# Altium PCB power.PcbDoc
Units mm, origin at the board's own origin, x right, y up, seen from the top; angles counter-clockwise.
Board outline 42.42 x 81.41 mm, 4 copper layers (Top Layer, Layer 1, Layer 2, Bottom Layer), stack 0.603 mm thick; 57 components, 23 nets, 124 pads, 0 vias.
Unrouted connection lines stored in the file: 27.
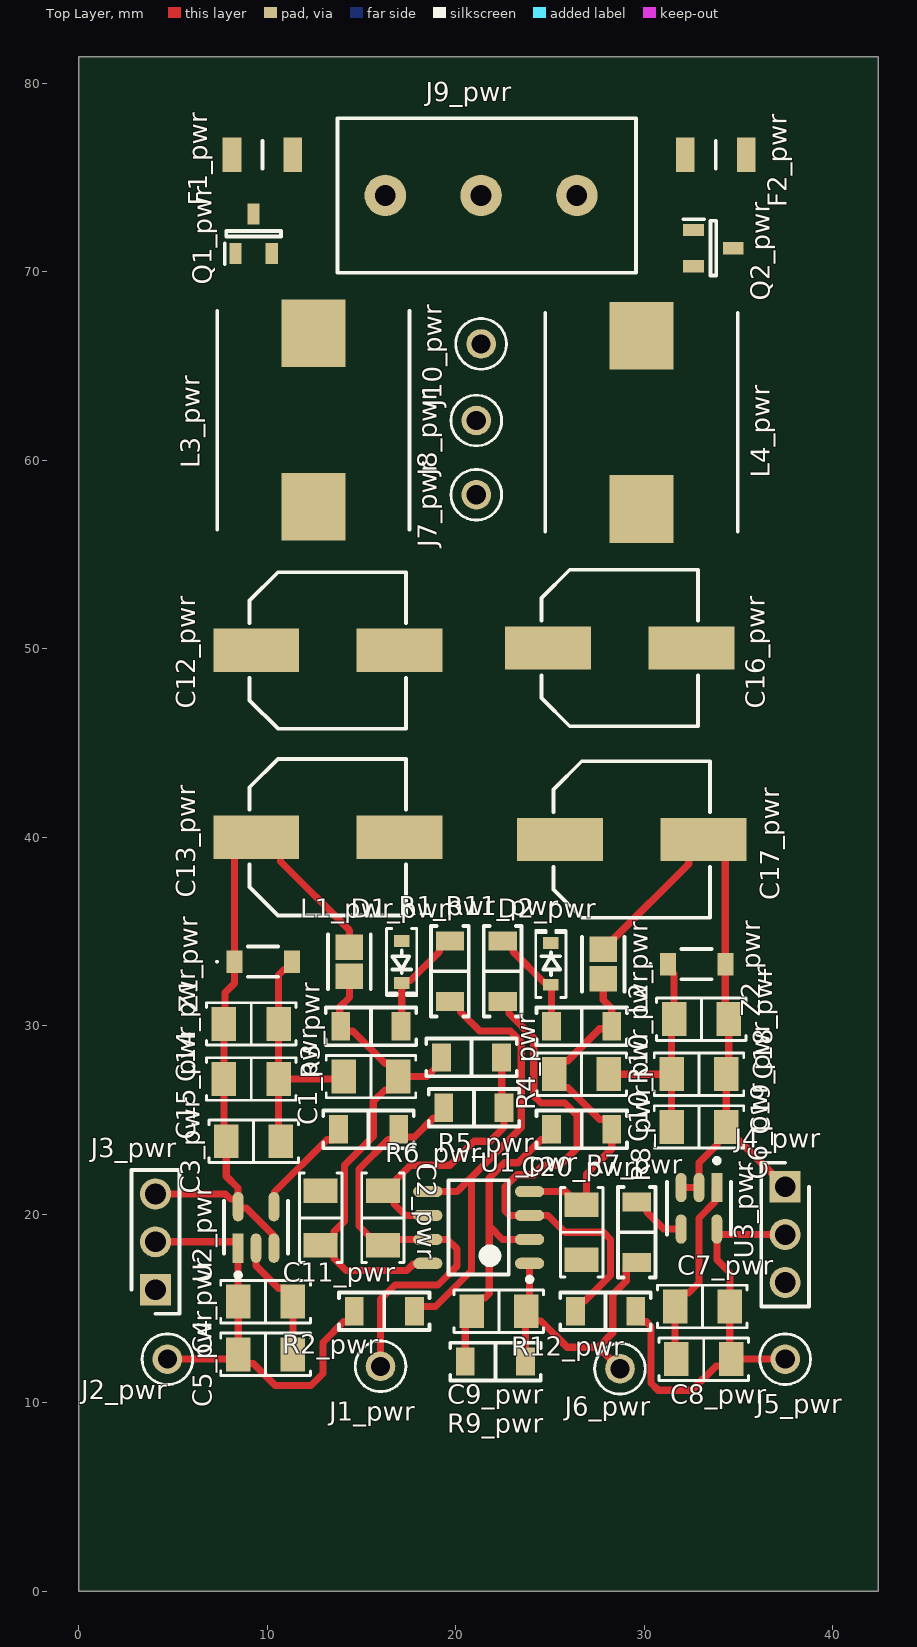
[diagram p0: Top Layer view]
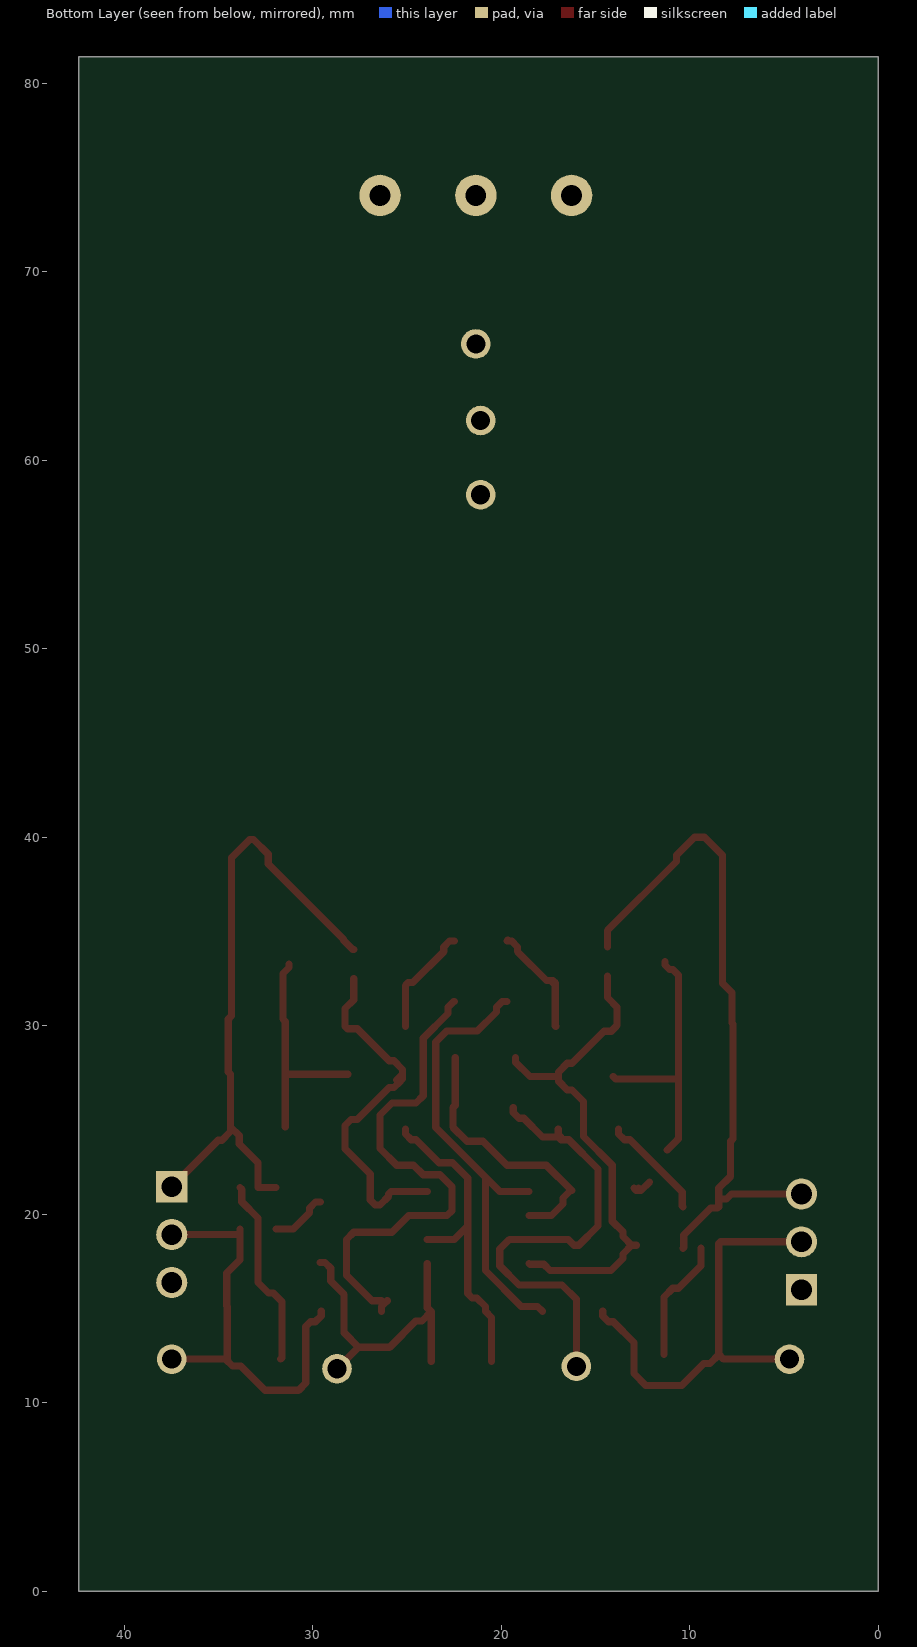
[diagram p1: Bottom Layer view, seen from below]

## Layer stack, top to bottom
Top Solder: solder mask 0.0102, Solder Resist, Dk 3.5
Top Layer: signal copper 0.0356
Dielectric 2: prepreg 0.0711, PP-006, Dk 4.1
Layer 1: signal copper 0.035
Dielectric 1: dielectric 0.32, FR-4, Dk 4.8
Layer 2: signal copper 0.035
Dielectric 3: prepreg 0.0711, PP-006, Dk 4.1
Bottom Layer: signal copper 0.0356
Bottom Solder: solder mask 0.0102, Solder Resist, Dk 3.5

## Board outline
0,0 0,81.407 42.418,81.407 42.418,0

## Design rules (kind name [scope] priority, off if disabled: settings)
BoardOutlineClearance [All] p1: gap=0.3 ignorepadtopadclearanceinfootprint=FALSE except(0.4: Arc-SplitBarrior Arc-SplitContinuation Track-SplitBarrior Track-SplitContinuation SMDPad-SplitBarrior SMDPad-SplitContinuation THPad-SplitBarrior THPad-SplitContinuation Via-SplitBarrior Via-SplitContinuation Fill-SplitBarrior Fill-SplitContinuation Poly-SplitBarrior Poly-SplitContinuation Region-SplitBarrior Region-SplitContinuation Text-SplitBarrior Text-SplitContinuation)
Clearance "Clearance Different Nets" [All] p1: gap=0.2 ignorepadtopadclearanceinfootprint=FALSE except(0.089: Arc-Arc Arc-Track Arc-SMDPad Track-Track Track-SMDPad; 0.127: SMDPad-SMDPad SMDPad-Via THPad-Via Via-Via; 0.254: Arc-Via Arc-Text Track-Via Track-Text SMDPad-Text THPad-Text Via-Text Fill-Text Poly-Text Region-Text Text-Text; 0.5: THPad-THPad Via-Hole)
Clearance "Clearance Same Nets" [All] p2: gap=0.2 ignorepadtopadclearanceinfootprint=FALSE except(0.089: Arc-Arc Arc-Track Arc-SMDPad Track-Track Track-SMDPad SMDPad-SMDPad; 0.127: SMDPad-Via THPad-Via; 0.254: Arc-Via Arc-Text Track-Via Track-Text SMDPad-Text THPad-Text Via-Via Via-Text Fill-Text Poly-Text Region-Text Text-Text)
Clearance "Clearance Bottom Layer" [OnLayer('Bottom Layer')] p3: gap=0.203 ignorepadtopadclearanceinfootprint=TRUE except(0.254: Arc-Text Track-Text SMDPad-Text THPad-Text Via-Text Fill-Text Poly-Text Region-Text Text-Text)
Clearance "Clearance Top Layer" [OnLayer('Top Layer')] p4: gap=0.203 ignorepadtopadclearanceinfootprint=TRUE except(0.254: Arc-Text Track-Text SMDPad-Text THPad-Text Via-Text Fill-Text Poly-Text Region-Text Text-Text)
Clearance [All] p5: gap=0.254 ignorepadtopadclearanceinfootprint=FALSE except(0: Arc-Hole Track-Hole SMDPad-Hole THPad-Hole Via-Hole Fill-Hole Poly-Hole Region-Hole Text-Hole)
HoleSize [All] p1: absolutevalues=TRUE maxlimit=6.3 minlimit=0.2 maxpercent=80.000 minpercent=20.000
MinimumAnnularRing [All] p1: minimumring=0.13
MinimumSolderMaskSliver [All] p1: minsoldermaskwidth=0.1
ParallelSegment [All] p1: limit=254 gap=0.254
PolygonConnect PolygonConnect_1 [All] p1: thpad.connectstyle=Relief thpad.reliefconductorwidth=0.508 thpad.reliefentries=4 thpad.polygonreliefangle="90 Angle" thpad.airgapwidth=0.254 smdpad.connectstyle=Relief smdpad.reliefconductorwidth=0.508 smdpad.reliefentries=4 smdpad.polygonreliefangle="90 Angle" smdpad.airgapwidth=0.254 via.connectstyle=Direct via.reliefconductorwidth=0.508 via.reliefentries=4 via.polygonreliefangle="90 Angle" via.airgapwidth=0.254
PolygonConnect [All] p2: connectstyle=Relief reliefconductorwidth=0.254 reliefentries=4 polygonreliefangle="90 Angle" airgapwidth=0.254
RoutingCorners [All] p1: cornerstyle=Round minsetback=2.54 maxsetback=2.54
RoutingVias [All] p1: holewidth=0.5 width=1 viastyle="Through Hole" minholewidth=0.2 minwidth=0.35 maxholewidth=1 maxwidth=2
SilkToSilkClearance [All] p1: silktosilkclearance=0.1
SilkToSolderMaskClearance [IsPad] p1: minsilkscreentomaskgap=0.1 clearancetoexposedcopper=TRUE
SolderMaskExpansion [All] p1: expansion=0.102 istentingtop=FALSE
Width [All] p1: maxlimit=2.54 minlimit=0.089 preferedwidth=0.381
25 further rules are at their usual default settings.

## Classes and differential pairs
component class misc_pwr: C11_pwr C12_pwr C13_pwr C14_pwr C15_pwr C16_pwr C17_pwr C18_pwr C19_pwr C20_pwr F1_pwr F2_pwr J7_pwr J8_pwr J9_pwr J10_pwr L3_pwr L4_pwr Q1_pwr Q2_pwr Z1_pwr Z2_pwr
component class LDO: C1_pwr C2_pwr C3_pwr C4_pwr C5_pwr C6_pwr C7_pwr C8_pwr C9_pwr C10_pwr D1_pwr D2_pwr D? J1_pwr J2_pwr J3_pwr J4_pwr J5_pwr J6_pwr L1_pwr L2_pwr R1_pwr R2_pwr R3_pwr R4_pwr R5_pwr R6_pwr R7_pwr R8_pwr R9_pwr R10_pwr R11_pwr R12_pwr U1_pwr U2_pwr U3_pwr

## Components (designator, comment, footprint, x,y, rotation, side; value= is the part's Value field where it differs from the comment)
C1_pwr "10 µF" "CAP 1206_3216 - 0.8MM" 15.506,27.305 r0 top
C2_pwr "47pF" "CAP 1206_3216 - 1.8MM" 16.141,19.812 r270 top
C3_pwr "2.2 µF" "CAP 1206_3216 - 0.8MM" 9.283,23.876 r180 top
C4_pwr "2.2 µF" "CAP 1206_3216 - 0.8MM" 9.918,15.367 r180 top
C5_pwr "2.2 µF" "CAP 1206_3216 - 0.8MM" 9.918,12.573 r180 top
C6_pwr "2.2 µF" "CAP 1206_3216 - 0.8MM" 32.905,24.638 r0 top
C7_pwr "2.2 µF" "CAP 1206_3216 - 0.8MM" 33.085,15.113 r0 top
C8_pwr "2.2 µF" "CAP 1206_3216 - 0.8MM" 33.159,12.319 r0 top
C9_pwr "47pF" "CAP 1206_3216 - 1.8MM" 22.29,14.859 r0 top
C10_pwr "10 µF" "CAP 1206_3216 - 0.8MM" 26.682,27.432 r180 top
C11_pwr "0.1 µF" "CAP 1206_3216 - 0.8MM" 12.839,19.812 r90 top
C12_pwr "100 µF" "CAP ALSMD 8.3MM H10.5MM" 13.22,49.911 r0 top
C13_pwr "100 µF" "CAP ALSMD 8.3MM H10.5MM" 13.22,40.005 r0 top
C14_pwr "10 µF" "CAP 1206_3216 - 0.8MM" 9.156,30.099 r180 top
C15_pwr "0.1 µF" "CAP 1206_3216 - 0.8MM" 9.156,27.178 r180 top
C16_pwr "100 µF" "CAP ALSMD 8.3MM H10.5MM" 28.704,50.038 r0 top
C17_pwr "100 µF" "CAP ALSMD 8.3MM H10.5MM" 29.339,39.878 r0 top
C18_pwr "10 µF" "CAP 1206_3216 - 0.8MM" 33.032,30.353 r180 top
C19_pwr "0.1 µF" "CAP 1206_3216 - 0.8MM" 32.905,27.432 r180 top
C20_pwr "0.1 µF" "CAP 1206_3216 - 0.8MM" 26.682,19.05 r90 top
D1_pwr "1V8" SOD323 17.157,33.401 r270 top
D2_pwr "1V8" SOD323 25.031,33.274 r90 top
F1_pwr "PTS12066V150" FUSC3216X90N 9.75,76.2 r0 top
F2_pwr "PTS12066V150" FUSC3216X90N 33.794,76.2 r180 top
J1_pwr "5001" FP-5001-MFG 16.014,11.938 r0 top
J2_pwr "5001" FP-5001-MFG 4.711,12.319 r0 top
J3_pwr "M20-9990346" "HDRV3W64P0X254_1X3_762X254X864P - duplicate" 4.076,16.002 r90 top
J4_pwr "M20-9990346" "HDRV3W64P0X254_1X3_762X254X864P - duplicate" 37.477,21.463 r270 top
J5_pwr "5001" FP-5001-MFG 37.477,12.319 r0 top
J6_pwr "5001" FP-5001-MFG 28.714,11.811 r0 top
J7_pwr "5001" FP-5001-MFG 21.094,58.166 r0 top
J8_pwr "5001" FP-5001-MFG 21.094,62.103 r0 top
J9_pwr "282837-3" "TE 282837-3" 21.348,74.041 r0 top
J10_pwr "5001" FP-5001-MFG 21.348,66.167 r0 top
L1_pwr "3.3uH" FP-MLZ2012-1_25-IPC_B 14.363,33.401 r270 top
L2_pwr "3.3uH" FP-MLZ2012-1_25-IPC_B 27.825,33.274 r270 top
L3_pwr "33uH" INDPM116102X400N 12.458,62.131 r270 top
L4_pwr "33uH" INDPM116102X400N 29.857,62.004 r90 top
Q1_pwr "DMP3125L-7" SOT96P240X110-3N 9.283,72.009 r90 top
Q2_pwr "DMG3406L-13" SOT96P240X110-3N 33.667,71.247 r0 top
R1_pwr "10 kOhms" "YAGEO RES 1206_3216" 19.697,32.893 r90 top
R2_pwr "10 kOhms" "YAGEO RES 1206_3216" 16.217,14.859 r0 top
R3_pwr "1 kOhms" "YAGEO RES 1206_3216" 15.506,29.972 r0 top
R4_pwr "10 kOhms" "YAGEO RES 1206_3216" 20.84,28.321 r180 top
R5_pwr "10 kOhms" "YAGEO RES 1206_3216" 20.967,25.654 r0 top
R6_pwr "3.3 kOhms" "YAGEO RES 1206_3216" 15.379,24.511 r180 top
R7_pwr "3.3 kOhms" "YAGEO RES 1206_3216" 29.603,19.05 r270 top
R8_pwr "10 kOhms" "YAGEO RES 1206_3216" 26.682,24.511 r0 top
R9_pwr "10 kOhms" "YAGEO RES 1206_3216" 22.11,12.192 r180 top
R10_pwr "1 kOhms" "YAGEO RES 1206_3216" 26.682,29.972 r0 top
R11_pwr "10 kOhms" "YAGEO RES 1206_3216" 22.491,32.893 r90 top
R12_pwr "10 kOhms" "YAGEO RES 1206_3216" 27.952,14.859 r180 top
U1_pwr "TLV9362" SOIC8-127P600X175-8N 21.221,19.304 r180 top
U2_pwr "ST730MR" FP-UJ-5-IPC_B 9.41,19.304 r90 top
U3_pwr "ADP7182AUJZ-R7" FP-UJ-5-IPC_B 32.905,20.32 r270 top
Z1_pwr "SMF15VTFTR" SMF15VTFTR 9.791,33.401 r90 top
Z2_pwr "SMF15VTFTR" SMF15VTFTR 32.778,33.274 r90 top

## Footprints (in the part's own frame and the unit in brackets; to place one, negate y for a bottom-side part, rotate by r counter-clockwise, add the part's x,y. Pads: shape width x height; smd on the part's side, far side on the other; paste and mask are expansions set on the pad)
"CAP 1206_3216 - 0.8MM" [mm] "Chip Capacitor, 2-Leads, Body 3.25x1.60mm, IPC Medium Density"
  rect 1.3x1.8 smd: 1(-1.45,0) 2(1.45,0)
  silkscreen extent -2.37,-1.12 2.37,1.12, body extent -1.6,-0.8 1.6,0.8, height 0.8
"CAP 1206_3216 - 1.8MM" [mm] "Chip Capacitor, 2-Leads, Body 3.25x1.60mm, IPC Medium Density"
  rect 1.3x1.8 smd: 1(-1.45,0) 2(1.45,0)
  silkscreen extent -2.37,-1.12 2.37,1.12, body extent -1.6,-0.8 1.6,0.8, height 1.8
"CAP ALSMD 8.3MM H10.5MM" [mm] "Aluminum Electrolytic Capacitor, Body 8.30x8.30x10.50mm, IPC Low Density"
  rect 4.55x2.3 smd: 1(-3.8,0) 2(3.8,0)
  silkscreen extent -4.15,-4.15 4.15,4.15, body extent -4.95,-4.15 4.95,4.15, height 10.5
FP-5001-MFG [mm]
  round 1.57 hole 1.016 paste-2539.97 mask+0: 1(0,0)
  silkscreen extent -1.35,-1.34 1.35,1.34, body extent -1.45,-1.45 1.45,1.45, height 0.25
FP-MLZ2012-1_25-IPC_B [mm]
  rect 1.354x1.456 smd paste+0 mask+0: 1(-0.776,0) 2(0.776,0)
  silkscreen extent -1.45,-1.13 1.45,1.13, body extent -1.7,-0.98 1.7,0.98, height 0.25
FP-UJ-5-IPC_B [mm]
  rect 1.554x0.572 smd paste+0 mask+0: 1(-1.1,0.95)
  rrect100% 1.554x0.572 smd paste+0 mask+0: 2(-1.1,0) 3(-1.1,-0.95) 4(1.1,-0.95) 5(1.1,0.95)
  silkscreen extent -2.65,-1.7 1.4,1.7, body extent -2.13,-1.7 2.13,1.7, height 0.25
FUSC3216X90N [mm]
  rect 0.99x1.82 smd: 1(-1.61,0) 2(1.61,0)
  silkscreen extent 0,-0.72 0,0.72, body extent -1.6,-0.8 1.6,0.8, height 0.71
"HDRV3W64P0X254_1X3_762X254X864P - duplicate" [mm]
  rect 1.65x1.65 hole 1.1: 1(0,0)
  round 1.65 hole 1.1: 2(2.54,0) 3(5.08,0)
  silkscreen extent -1.27,-1.27 6.35,1.27, body extent -1.27,-1.27 6.35,1.27, height 8.64
INDPM116102X400N [mm]
  rect 3.6x3.4 smd: 1(-4.6,0) 2(4.6,0)
  silkscreen extent -5.8,-5.1 5.8,5.1, body extent -5.8,-5.1 5.8,5.1, height 4
SMF15VTFTR [mm]
  rect 1.2x0.85 smd: 1(0,1.525) 2(0,-1.525)
  silkscreen extent -0.8,-0.8 0.8,2.5, body extent -0.8,-1.87 0.8,1.87, height 1
SOD323 [mm]
  rect 0.625x0.83 smd: 1(-1.101,-0.02) 2(1.124,-0.02)
  silkscreen extent -1.77,-0.82 1.79,0.78, body extent -1.35,-0.64 1.37,0.6, height 1.05
SOIC8-127P600X175-8N [mm] "SOIC, 8-Leads, Body 4.91x3.90mm, Pitch 1.27mm, IPC Medium Density"
  oval 1.55x0.6 smd: 1(-2.7,1.905) 2(-2.7,0.635) 3(-2.7,-0.635) 4(-2.7,-1.905) 5(2.7,-1.905) 6(2.7,-0.635) 7(2.7,0.635) 8(2.7,1.905)
  silkscreen extent -2.83,-2.5 1.6,2.88, body extent -3,-2.5 3,2.5, height 1.75
SOT96P240X110-3N [mm]
  rect 1.1x0.65 smd: 1(-1.05,0.96) 2(-1.05,-0.96) 3(1.05,0)
  silkscreen extent -1.6,-1.45 0.15,1.54, body extent -1.2,-1.45 1.2,1.45, height 1.1
"TE 282837-3" [mm] "Wire to Board Terminal Block Horizontal with Board, 3 Postions, Body 15.84x8.2mm, Pitch 5.08mm"
  round 2.2 hole 1.1: 1(-5.08,0) 2(0,0) 3(5.08,0)
  silkscreen extent -7.62,-4.1 8.22,4.1, body extent -7.62,-4.1 8.22,4.1, height 10.3
"YAGEO RES 1206_3216" [mm] "Chip Resistor, 2-Leads, Body 3.13x1.55mm"
  rect 1x1.5 smd: 1(-1.6,0) 2(1.6,0)
  silkscreen extent -2.4,-1 2.4,1, body extent -1.6,-0.8 1.6,0.8, height 0.6

## Part data
C1_pwr C10_pwr C14_pwr C18_pwr: library part 885012208069, "CAP CER 10UF 25V X7R 1206", Device Package="1206 (3216 Metric)", manufacturer="Würth Elektronik", Operating Temperature="-55°C ~ 125°C", Supplier Part Number 1=732-7574-1-ND, Temperature Coefficient=X7R, Tolerance=±10%, Voltage - Rated=25V, Applications="General Purpose", Capacitance="10 µF", componentlink1description=Datasheet, componentlink1url=https://katalog.we-online.de/pbs/datasheet/885012208069.pdf, componentlink2description="DigiKey Link", componentlink2url=https://www.digikey.com/en/products/detail/würth-elektronik/885012208069/5453429, lastupdated="6/4/2024 19:10:32", Lifecycle Status=Active, Minimum Order=1, Mounting Type="Surface Mount, MLCC", Package / Case="1206 (3216 Metric)", Packaging=TapeAndReel, Part Number=885012208069, Part Status=Active, partid=43199, price=0.40, Series=WCAP-CSGP, Size / Dimension="0.126\" L x 0.063\" W (3.20mm x 1.60mm)", Supplier 1=DigiKey, Thickness (Max)="0.075\" (1.90mm)"
C2_pwr C9_pwr: library part 1206AA470KAT1A, "CAP CER 47PF 1KV C0G/NP0 1206", Device Package="1206 (3216 Metric)", manufacturer="AVX Corporation", Operating Temperature="-55°C ~ 125°C", Supplier Part Number 1=478-2949-1-ND, Temperature Coefficient="C0G, NP0", Tolerance=±10%, Voltage - Rated="1000V (1kV)", Applications="General Purpose", Capacitance=47pF, componentlink1description=Datasheet, componentlink1url=http://datasheets.avx.com/AVX-HV_MLCC.pdf, componentlink2description="DigiKey Link", componentlink2url=http://digikey.com/product-detail/en/avx-corporation/1206AA470KAT1A/478-2949-1-ND/808148, Features="High Voltage", lastupdated="9/2/2020 01:05:31", Lifecycle Status=Active, Minimum Order=1, Mounting Type="Surface Mount, MLCC", Package / Case="1206 (3216 Metric)", Packaging=TapeAndReel, Part Number=1206AA470KAT1A, Part Status=Active, partid=21825, price=0.11, Series=-, Size / Dimension="0.130\" L x 0.063\" W (3.30mm x 1.60mm)", Supplier 1=DigiKey, Thickness (Max)="0.071\" (1.80mm)"
C3_pwr C4_pwr C5_pwr C6_pwr C7_pwr C8_pwr: library part 885382208001, "CAP CER 2.2UF 25V X7R 1206", Device Package="1206 (3216 Metric)", manufacturer="Würth Elektronik", Operating Temperature="-55°C ~ 125°C", Supplier Part Number 1=732-13199-1-ND, Temperature Coefficient=X7R, Tolerance=±10%, Voltage - Rated=25V, Applications="Boardflex Sensitive", Capacitance="2.2 µF", componentlink2description="DigiKey Link", componentlink2url=https://www.digikey.com/en/products/detail/würth-elektronik/885382208001/9816354, Features="Soft Termination", lastupdated="6/4/2024 19:10:38", Lifecycle Status=Active, Minimum Order=1, Mounting Type="Surface Mount, MLCC", Package / Case="1206 (3216 Metric)", Packaging=TapeAndReel, Part Number=885382208001, Part Status=Active, partid=45904, price=0.35, Series=WCAP-CSST, Size / Dimension="0.126\" L x 0.063\" W (3.20mm x 1.60mm)", Supplier 1=DigiKey, Thickness (Max)="0.083\" (2.10mm)"
C11_pwr C15_pwr C19_pwr C20_pwr: library part 885012208087, "CAP CER 0.1UF 50V X7R 1206", Device Package="1206 (3216 Metric)", manufacturer="Würth Elektronik", Operating Temperature="-55°C ~ 125°C", Supplier Part Number 1=732-8127-1-ND, Temperature Coefficient=X7R, Tolerance=±10%, Voltage - Rated=50V, Applications="General Purpose", Capacitance="0.1 µF", componentlink1description=Datasheet, componentlink1url=https://katalog.we-online.de/pbs/datasheet/885012208087.pdf, componentlink2description="DigiKey Link", componentlink2url=https://www.digikey.com/en/products/detail/würth-elektronik/885012208087/5453982, lastupdated="6/4/2024 19:10:27", Lifecycle Status=Active, Minimum Order=1, Mounting Type="Surface Mount, MLCC", Package / Case="1206 (3216 Metric)", Packaging=TapeAndReel, Part Number=885012208087, Part Status=Active, partid=20879, price=0.06, Series=WCAP-CSGP, Size / Dimension="0.126\" L x 0.063\" W (3.20mm x 1.60mm)", Supplier 1=DigiKey, Thickness (Max)="0.035\" (0.90mm)"
C12_pwr C13_pwr C16_pwr C17_pwr: library part 50TZV100M8X10.5, "CAP ALUM 100UF 20% 50V SMD", Device Package="Radial, Can - SMD", Lifetime @ Temp.="2000 Hrs @ 105°C", manufacturer=Rubycon, Operating Temperature="-55°C ~ 105°C", Ratings=AEC-Q200, Ripple Current @ High Frequency="350 mA @ 100 kHz", Ripple Current @ Low Frequency="175 mA @ 120 Hz", Supplier Part Number 1=1189-1651-1-ND, Tolerance=±20%, Voltage - Rated="50 V", Applications=Automotive, Capacitance="100 µF", componentlink1description=Datasheet, componentlink1url=http://www.rubycon.co.jp/en/catalog/e_pdfs/aluminum/e_tzv.pdf, componentlink2description="DigiKey Link", componentlink2url=https://www.digikey.com/en/products/detail/rubycon/50TZV100M8X10-5/3134931, Height - Seated (Max)="0.413\" (10.50mm)", Impedance="340 mOhms", lastupdated="6/3/2024 20:15:48", Lifecycle Status=Active, Minimum Order=1, Mounting Type="Surface Mount", Package / Case="Radial, Can - SMD", Packaging=TapeAndReel, Part Number=50TZV100M8X10.5, Part Status=Active, partid=7533, Polarization=Polar, price=0.16, Series=TZV, Size / Dimension="0.315\" Dia (8.00mm)", Supplier 1=DigiKey, Surface Mount Land Size="0.327\" L x 0.327\" W (8.30mm x 8.30mm)"
D1_pwr D2_pwr: library part BZX38450-C1V8X
F1_pwr F2_pwr: "Fuse", Arrow Part Number=PTS120660V005, Manufacturer_Name=Eaton, Mouser Part Number=504-PTS12066V150, Arrow Price/Stock=https://www.arrow.com/en/products/pts120660v005/eaton?region=europe, Datasheet Link=https://in.element14.com/eaton-bussmann-series/pts120660v005/pptc-resettable-fuse-0-05a-60vdc/dp/2929344?srsltid=AfmBOorX1B25_1GKuczfUlW7ilxwoZgl3KmxHJmMFzJpoWYAJ50DmC3S, Height=0.9mm, Manufacturer_Part_Number=PTS12066V150, Mouser Price/Stock=https://www.mouser.co.uk/ProductDetail/Eaton-Electronics/PTS120660V005?qs=QmibqUXyDhQPirhmCJ6OpQ%3D%3D
J1_pwr J2_pwr J5_pwr J6_pwr J7_pwr J8_pwr J10_pwr: library part CMP-2000-05181-2, "PC TEST POINT MINIATURE BLACK", Color=Black, Flammability Rating="UL94 V-0", Package Quantity=100, Body Material=Bronze, Contact Material=Bronze, Contact Plating=Silver, Diameter=2.54mm, Height=0.3inch, Hole Diameter=1.6mm, Housing Color=Black, Inside Diameter=1.27mm, Insulation=Insulated, Insulation Material=Nylon, Lead Free="Lead Free", Length=7.62mm, Material=Nylon, Mount="Through Hole", Number of Contacts=1, Number of Ports=1, Orientation=Straight, Outside Diameter=2.54mm, Packaging=Bulk, Plating=Silver, REACH SVHC="No SVHC", RoHS Compliant=Yes, Series=THM, Termination="Through Hole"
J3_pwr J4_pwr: "Connector", Manufacturer_Name=Harwin, Mouser Part Number=855-M20-9990346, Datasheet Link=https://cdn.harwin.com/pdfs/M20-999.pdf, Height=8.64mm, Manufacturer_Part_Number=M20-9990346, Mouser Price/Stock=https://www.mouser.co.uk/ProductDetail/Harwin/M20-9990346?qs=ulE8k0yEMYbyhQ3uXpFs8Q%3D%3D
J9_pwr: "TERM BLK 3P SIDE ENT 5.08MM PCB", Color=Green, Current="13.5 A", manufacturer="TE Connectivity AMP Connectors", Supplier Part Number 1=A113321-ND, Voltage="300 V", componentlink1description=Datasheet, componentlink1url=https://www.te.com/commerce/DocumentDelivery/DDEController?Action=srchrtrv&DocNm=282837&DocType=Customer+Drawing&DocLang=English, componentlink2description="DigiKey Link", componentlink2url=https://www.digikey.com/en/products/detail/te-connectivity-amp-connectors/282837-3/2187974, Features="Interlocking (Side)", lastupdated="6/21/2022 15:00:39", Lifecycle Status=Active, Mating Orientation="Horizontal with Board", Minimum Order=1, Mounting Type="Through Hole", Number of Levels=1, Packaging=Tray, Part Number=282837-3, Part Status=Active, Pitch="0.200\" (5.08mm)", Positions Per Level=3, price=0.47, Series=Buchanan, Supplier 1=DigiKey, Wire Gauge="16-28 AWG", Wire Termination="Screw - Rising Cage Clamp"
L1_pwr L2_pwr: library part MLZ2012M, "Shielded Multilayer Inductor 3.3uH ±20% 500mA 260mΩ SMD 0805", Case Code (Imperial)=0805, Case Code (Metric)=2012, Current Rating=500mA, DC Resistance (DCR)=260mR, Max Operating Temperature=125°C, Min Operating Temperature=-55°C, Package Quantity=2000, Saturation Current=350mA, Tolerance=20%, Case/Package=0805, Core Material=Ferrite, Height - Seated (Max)=0.057inch, Inductance=3.3uH, Lead Free="Lead Free", Length=0.079inch, Mount="Surface Mount", Packaging="Tape and Reel", RoHS Compliant=Yes, Shielding=Shielded, Width=0.049inch
L3_pwr L4_pwr: library part AMRM00101040330MA1, "Inductor", Manufacturer_Name="Pulse Electronics", Mouser Part Number=673-AMRM101040330MA1, Datasheet Link=https://productfinder.pulseelectronics.com/api/open/part-attachments/datasheet/amrm00101040330ma1, Height=4mm, Manufacturer_Part_Number=AMRM00101040330MA1, Mouser Price/Stock=https://www.mouser.co.uk/ProductDetail/Pulse-Electronics/AMRM00101040330MA1?qs=HoCaDK9Nz5eI6M5ad0CXDA%3D%3D
Q1_pwr: "MOSFET (P-Channel)", Manufacturer_Name="Diodes Incorporated", Mouser Part Number=621-DMP3125L-7, Arrow Part Number=DMP3125L-7, Arrow Price/Stock=https://www.arrow.com/en/products/dmp3125l-7/diodes-incorporated?region=nac, Datasheet Link=https://www.diodes.com//assets/Datasheets/DMP3125L.pdf, Height=1.1mm, Manufacturer_Part_Number=DMP3125L-7, Mouser Price/Stock=https://www.mouser.co.uk/ProductDetail/Diodes-Incorporated/DMP3125L-7?qs=W0yvOO0ixfH8ma8MdHfXQA%3D%3D
Q2_pwr: "MOSFET (N-Channel)", Manufacturer_Name="Diodes Incorporated", Mouser Part Number=621-DMG3406L-13, Arrow Part Number=DMG3406L-13, Arrow Price/Stock=https://www.arrow.com/en/products/dmg3406l-13/diodes-incorporated?region=nac, Datasheet Link=https://www.diodes.com//assets/Datasheets/DMG3406L.pdf, Height=1.1mm, Manufacturer_Part_Number=DMG3406L-13, Mouser Price/Stock=https://www.mouser.co.uk/ProductDetail/Diodes-Incorporated/DMG3406L-13?qs=BvpHGKeVh3r%252BRZTTCOfjpg%3D%3D
R1_pwr R2_pwr R4_pwr R5_pwr R8_pwr R9_pwr R11_pwr R12_pwr: library part RT1206FRE0710KL, "RES SMD 10K OHM 1% 1/4W 1206", Device Package="1206 (3216 Metric)", manufacturer=Yageo, Operating Temperature="-55°C ~ 155°C", Power (Watts)="0.25W, 1/4W", Supplier Device Package=1206, Supplier Part Number 1=YAG1242CT-ND, Temperature Coefficient=±50ppm/°C, Tolerance=±1%, componentlink1description=Datasheet, componentlink1url=https://www.yageo.com/upload/media/product/productsearch/datasheet/rchip/PYu-RT_1-to-0.01_RoHS_L_11.pdf, componentlink2description="DigiKey Link", componentlink2url=https://www.digikey.com/en/products/detail/yageo/RT1206FRE0710KL/1082868, Composition="Thin Film", Height - Seated (Max)="0.026\" (0.65mm)", lastupdated="7/25/2024 09:21:28", Lifecycle Status=Active, Minimum Order=1, Number of Terminations=2, Package / Case="1206 (3216 Metric)", Packaging=TapeAndReel, Part Number=RT1206FRE0710KL, Part Status=Active, partid=38903, price=0.01, Resistance="10 kOhms", Series=RT, Size / Dimension="0.122\" L x 0.063\" W (3.10mm x 1.60mm)", Supplier 1=DigiKey
R3_pwr R10_pwr: library part RT1206FRE071KL, "RES SMD 1K OHM 1% 1/4W 1206", Device Package="1206 (3216 Metric)", manufacturer=Yageo, Operating Temperature="-55°C ~ 155°C", Power (Watts)="0.25W, 1/4W", Supplier Device Package=1206, Supplier Part Number 1=YAG3366CT-ND, Temperature Coefficient=±50ppm/°C, Tolerance=±1%, componentlink1description=Datasheet, componentlink1url=https://www.yageo.com/upload/media/product/productsearch/datasheet/rchip/PYu-RT_1-to-0.01_RoHS_L_11.pdf, componentlink2description="DigiKey Link", componentlink2url=https://www.digikey.com/en/products/detail/yageo/RT1206FRE071KL/1083016, Composition="Thin Film", Height - Seated (Max)="0.026\" (0.65mm)", lastupdated="7/25/2024 09:21:27", Lifecycle Status=Active, Minimum Order=1, Number of Terminations=2, Package / Case="1206 (3216 Metric)", Packaging=TapeAndReel, Part Number=RT1206FRE071KL, Part Status=Active, partid=40465, price=0.01, Resistance="1 kOhms", Series=RT, Size / Dimension="0.122\" L x 0.063\" W (3.10mm x 1.60mm)", Supplier 1=DigiKey
R6_pwr R7_pwr: library part RT1206FRE073K3L, "RES SMD 3.3K OHM 1% 1/4W 1206", Device Package="1206 (3216 Metric)", manufacturer=Yageo, Operating Temperature="-55°C ~ 155°C", Power (Watts)="0.25W, 1/4W", Supplier Device Package=1206, Supplier Part Number 1=13-RT1206FRE073K3LCT-ND, Temperature Coefficient=±50ppm/°C, Tolerance=±1%, componentlink1description=Datasheet, componentlink1url=https://www.yageo.com/upload/media/product/productsearch/datasheet/rchip/PYu-RT_1-to-0.01_RoHS_L_12.pdf, componentlink2description="DigiKey Link", componentlink2url=https://www.digikey.com/en/products/detail/yageo/RT1206FRE073K3L/1083187, Composition="Thin Film", Height - Seated (Max)="0.026\" (0.65mm)", lastupdated="7/25/2024 09:21:22", Lifecycle Status=Active, Minimum Order=1, Number of Terminations=2, Package / Case="1206 (3216 Metric)", Packaging=TapeAndReel, Part Number=RT1206FRE073K3L, Part Status=Active, partid=58380, price=0.01, Resistance="3.3 kOhms", Series=RT, Size / Dimension="0.122\" L x 0.063\" W (3.10mm x 1.60mm)", Supplier 1=DigiKey
U1_pwr: "TLV936x 10-MHz, 40-V, RRO, Operational Amplifie", componentlink1description=Datasheet, componentlink1url=https://www.ti.com/lit/ds/symlink/tlv9362.pdf
U3_pwr: library part ADP7182, "IC REG LIN NEG ADJ 200MA 5TSOT", Ambient Temperature Range High=+85°C, Ambient Temperature Range Low=-40°C, Dropout Voltage=-185mV, manufacturer="Analog Devices", Max Junction Temp=+125°C, Max Supply Voltage=-28V, Min Supply Voltage=-2.7V, Nominal Supply Current=-33/-650uA, Output Current=-200mA, Output Voltage=-1.22/-27.815V, Package=UJ-5, Temperature="-40°C to +125°C", Accuracy Percentage=1%, Automotive=No, Category=IC, componentlink2description=Datasheet, componentlink2url=https://www.analog.com/media/en/technical-documentation/data-sheets/ADP7182.pdf, Device Class L1="Integrated Circuits (ICs)", Device Class L2="Power Management ICs", Device Class L3="Voltage Regulators - Linear", Digikey Description="IC REG LIN NEG ADJ 200MA 5TSOT", Height=1mm, Ipc Land Pattern Name=SOT95P280X100-5, Lead Free=Yes, Manufacturer Part Number=ADP7182AUJZ-R7, Mouser Description="LDO Regulator Neg -1.22V to -27V 0.2A 5-Pin TSOT T/R", Number Of Outputs=1, Octopart=https://octopart.com/adp7182aujz-r7-analog+devices-21054665, Output Type=AdjustableProgrammable, RoHS=TRUE, Temperature Range High=+125°C, Temperature Range Low=-40°C
Z1_pwr Z2_pwr: "Zener Diode", Manufacturer_Name="ROHM Semiconductor", Mouser Part Number=755-SMF15VTFTR, Datasheet Link=https://fscdn.rohm.com/en/products/databook/datasheet/discrete/diode/zener/smf15vtftr-e.pdf, Height=0.9mm, Manufacturer_Part_Number=SMF15VTFTR, Mouser Price/Stock=https://www.mouser.co.uk/ProductDetail/ROHM-Semiconductor/SMF15VTFTR?qs=HXFqYaX1Q2wU8NS9uLe0xg%3D%3D

## Nets (pads, with @x,y where several pads share a name; then routed paths per layer and width w, separated by ;. In a path a pad name is that pad's centre, name@x,y a point inside that pad or via, vN(x,y) a via of type N, cw(c..) or ccw(c..) an arc to the next point about the centre after c; other vN are vias at no path point)
GND: C1_pwr.1 C3_pwr.1 C4_pwr.1 C5_pwr.1 C6_pwr.1 C7_pwr.1 C8_pwr.1 C10_pwr.1 C11_pwr.2 C12_pwr.2 C13_pwr.2 C14_pwr.1 C15_pwr.1 C16_pwr.1 C17_pwr.1 C18_pwr.2 C19_pwr.2 C20_pwr.1 D1_pwr.1 D2_pwr.2 J8_pwr.1 J9_pwr.2 Q1_pwr.1 Q2_pwr.1 U2_pwr.2 U3_pwr.1 Z1_pwr.2 Z2_pwr.1 | length 44.4
  Top Layer w0.381: U2_pwr.2 9.41,17.272 10.606,16.077 10.909,16.077 11.368,15.617 C4_pwr.1 C5_pwr.1 ; C3_pwr.1@11.193,23.416 C3_pwr.1 10.606,24.003 C15_pwr.1 ; Z1_pwr.2 11.316,33.226 11.082,32.991 10.907,32.991 10.606,32.691 C14_pwr.1 C15_pwr.1 ; C11_pwr.2@12.13,21.722 12.589,21.262 C11_pwr.2 ; C11_pwr.2@12.712,21.389 C11_pwr.2 ; C11_pwr.2@12.966,21.389 C11_pwr.2 ; C1_pwr.1 13.929,27.178 C15_pwr.1 ; C10_pwr.1 C19_pwr.2 ; Z2_pwr.1 31.253,33.099 31.582,32.77 C18_pwr.2 31.455,30.226 C19_pwr.2 ; C6_pwr.1 C19_pwr.2 ; C8_pwr.1 31.635,12.393 C7_pwr.1 31.635,15.363 32.095,15.823 32.345,15.823 32.905,16.383 32.905,19.812 33.76,20.666 33.76,21.325 U3_pwr.1
NetC2_pwr_1: C2_pwr.1 R4_pwr.1 R5_pwr.2 U1_pwr.6 | length 14.4
  Top Layer w0.381: C2_pwr.1@16.264,21.262 17.608,22.606 19.697,22.606 20.967,23.876 21.819,23.876 22.567,24.625 R5_pwr.2 22.44,25.781 R4_pwr.1 ; C2_pwr.1@16.328,21.262 16.724,20.866 16.724,20.552 17.337,19.939 U1_pwr.6
NetC2_pwr_2: C2_pwr.2 J1_pwr.1 R5_pwr.1 R6_pwr.1 U1_pwr.7 | length 24.7
  Top Layer w0.381: J1_pwr.1 16.014,15.494 16.776,16.256 19.062,16.256 20.078,17.272 20.078,18.161 19.57,18.669 U1_pwr.7 16.448,18.669 C2_pwr.2 15.891,18.362 14.871,19.382 14.871,22.403 16.42,23.951 16.824,23.951 16.979,24.106 17.819,24.106 18.808,25.094 19.058,25.094 19.367,25.404 R5_pwr.1 ; R6_pwr.1@16.824,24.106 16.979,24.261 R6_pwr.1
NetC9_pwr_1: C9_pwr.1 R8_pwr.1 R9_pwr.2 U1_pwr.2 | length 17.4
  Top Layer w0.381: R9_pwr.2 20.51,14.529 C9_pwr.1 20.84,15.109 21.3,15.569 21.55,15.569 21.78,15.799 21.78,19.38 ; U1_pwr.2 22.491,18.669 21.78,19.38 ; R8_pwr.1 25.082,24.261 24.773,23.951 24.523,23.951 23.304,22.733 22.593,22.733 21.78,21.92 21.78,19.38
NetC9_pwr_2: C9_pwr.2 J6_pwr.1 R7_pwr.2 R9_pwr.1 U1_pwr.1 | length 17
  Top Layer w0.381: R9_pwr.1 23.71,14.829 C9_pwr.2 ; U1_pwr.1 23.921,15.04 C9_pwr.2 ; J6_pwr.1 27.571,12.954 ; R7_pwr.2 29.353,17.45 29.044,17.14 29.044,16.458 28.333,15.748 28.333,13.716 27.571,12.954 ; C9_pwr.2 23.74,14.802 24.2,14.342 24.532,14.342 25.92,12.954 27.571,12.954
NetD1_pwr_2: D1_pwr.2 R1_pwr.2 R3_pwr.2 | length 6.3
  Top Layer w0.381: R3_pwr.2 17.137,30.003 D1_pwr.2 ; R1_pwr.2@19.654,34.536 R1_pwr.2 19.447,34.493 19.138,34.183 19.138,33.933 17.604,32.4 D1_pwr.2@17.362,32.4 ; D1_pwr.2 17.259,32.4 D1_pwr.2@17.362,32.4 ; D1_pwr.2 17.24,32.277 D1_pwr.2@17.362,32.4
NetD2_pwr_1: D2_pwr.1 R10_pwr.1 R11_pwr.2 | length 5.9
  Top Layer w0.381: R11_pwr.2 22.741,34.493 23.051,34.183 23.051,33.933 24.69,32.295 24.929,32.295 D2_pwr.1 25.082,32.142 R10_pwr.1
NetF1_pwr_1: F1_pwr.1 J9_pwr.1
NetF1_pwr_2: F1_pwr.2 Q1_pwr.3
NetF2_pwr_1: F2_pwr.1 J9_pwr.3
NetF2_pwr_2: F2_pwr.2 Q2_pwr.3
NetL3_pwr_1: L3_pwr.1 Q1_pwr.2
NetL4_pwr_2: L4_pwr.2 Q2_pwr.2
NetR1_pwr_1: R1_pwr.1 R2_pwr.2 U1_pwr.5 | length 24.6
  Top Layer w0.381: R2_pwr.2 18.071,15.113 18.935,15.113 20.84,17.018 20.84,21.971 ; U1_pwr.5 20.078,21.209 20.84,21.971 ; R1_pwr.1 19.947,31.293 20.257,30.983 20.257,30.733 21.272,29.718 22.894,29.718 23.477,29.136 23.477,24.608 20.84,21.971
NetR6_pwr_2: R6_pwr.2 U2_pwr.4 | length 5.7
  Top Layer w0.381: U2_pwr.4 10.397,20.441 10.397,21.18 13.169,23.951 13.47,23.951 13.779,24.261 R6_pwr.2
NetR7_pwr_1: R7_pwr.1 U3_pwr.4 | length 3.1
  Top Layer w0.381: R7_pwr.1 29.853,20.65 30.163,20.34 30.163,20.09 31.033,19.22 U3_pwr.4
NetR11_pwr_1: R11_pwr.1 R12_pwr.2 U1_pwr.3 | length 27.6
  Top Layer w0.381: R11_pwr.1 22.518,31.293 22.828,30.983 22.828,30.651 24.142,29.337 24.142,26.289 24.523,25.908 25.793,25.908 26.428,25.273 26.428,23.495 25.539,22.606 24.65,22.606 24.142,22.098 23.253,22.098 22.618,21.463 22.618,20.193 22.872,19.939 24.904,19.939 25.793,19.05 27.825,19.05 28.206,18.669 28.206,16.764 26.861,15.419 26.352,15.419 R12_pwr.2@26.197,15.264 ; R12_pwr.2@26.043,15.419 R12_pwr.2@26.197,15.264 ; R12_pwr.2 26.352,15.109 R12_pwr.2@26.197,15.264
VCC: C3_pwr.2 C12_pwr.1 C13_pwr.1 C14_pwr.2 C15_pwr.2 J3_pwr.3 J7_pwr.1 L1_pwr.1 L3_pwr.2 U2_pwr.3 U2_pwr.5 Z1_pwr.1 | length 36.5
  Top Layer w0.381: J3_pwr.3 7.782,21.082 8.05,20.815 8.372,20.815 U2_pwr.5@8.46,20.726 ; U2_pwr.3 10.324,18.24 10.324,18.899 8.888,20.334 8.53,20.334 U2_pwr.5 U2_pwr.5@8.46,20.726 ; L1_pwr.1 14.363,35.062 10.712,38.713 10.712,39.045 9.752,40.005 C13_pwr.1 9.226,40.005 8.266,39.045 Z1_pwr.1 8.266,32.257 7.759,31.75 7.759,30.152 C14_pwr.2 C15_pwr.2 7.706,24.003 C3_pwr.2 7.833,22.024 8.46,21.397 U2_pwr.5@8.46,20.726
VCC_filtered: C1_pwr.2 C11_pwr.1 L1_pwr.2 R3_pwr.1 R4_pwr.2 U1_pwr.8 | length 27.3
  Top Layer w0.381: C11_pwr.1 C11_pwr.1@13.089,18.362 ; L1_pwr.2 14.363,31.496 13.855,30.988 13.855,30.023 R3_pwr.1 14.165,29.713 14.548,29.713 16.247,28.015 16.497,28.015 16.956,27.555 C1_pwr.2 ; U1_pwr.8 18.479,17.357 17.75,17.357 17.411,17.018 14.183,17.018 13.549,17.652 13.549,17.902 C11_pwr.1@13.089,18.362 ; R4_pwr.2 19.24,28.071 18.478,27.309 18.478,27.305 C1_pwr.2 ; C11_pwr.1@13.089,18.362 13.549,18.822 13.549,19.072 14.109,19.632 14.109,22.606 15.633,24.13 15.633,25.982 16.247,26.595 16.497,26.595 16.956,27.055 C1_pwr.2
VCC_LDO_OUT: C4_pwr.2 C5_pwr.2 J2_pwr.1 J3_pwr.2 R2_pwr.1 U2_pwr.1 | length 23.8
  Top Layer w0.381: J3_pwr.2 8.365,18.542 8.46,18.446 U2_pwr.1 8.46,15.375 C4_pwr.2 C5_pwr.2 ; J2_pwr.1 8.214,12.319 C5_pwr.2 ; R2_pwr.1 14.617,14.609 14.308,14.299 14.058,14.299 12.966,13.208 12.966,11.557 12.331,10.922 10.426,10.922 9.26,12.088 8.928,12.088 8.468,12.548 C5_pwr.2
VDD: C6_pwr.2 C16_pwr.2 C17_pwr.2 C18_pwr.1 C19_pwr.1 J4_pwr.1 J10_pwr.1 L2_pwr.1 L4_pwr.1 U3_pwr.2 U3_pwr.3 Z2_pwr.2 | length 33.4
  Top Layer w0.381: L2_pwr.1 27.876,34.05 28.363,34.537 28.363,34.587 32.362,38.586 32.362,39.1 C17_pwr.2 33.344,39.878 34.303,38.918 Z2_pwr.2 34.303,30.532 C18_pwr.1 34.482,27.559 C19_pwr.1 C6_pwr.2 ; U3_pwr.3 U3_pwr.2 32.905,22.733 33.896,23.723 33.896,24.178 C6_pwr.2 ; J4_pwr.1 35.012,23.928 34.815,23.928 34.355,24.388 C6_pwr.2
VDD_filtered: C10_pwr.2 C20_pwr.2 L2_pwr.2 R8_pwr.2 R10_pwr.2 U1_pwr.4 | length 19.7
  Top Layer w0.381: U1_pwr.4 25.835,21.209 25.973,21.071 25.973,20.96 26.432,20.5 C20_pwr.2 26.947,20.764 26.947,22.146 28.282,23.482 R8_pwr.2 28.282,24.714 27.973,25.024 27.64,25.024 25.942,26.722 25.692,26.722 25.414,27 25.232,27.182 C10_pwr.2 ; C10_pwr.2@25.539,27.125 25.357,27.307 C10_pwr.2 ; L2_pwr.2 27.825,31.369 28.282,30.912 R10_pwr.2 28.15,29.84 27.64,29.84 25.942,28.142 25.692,28.142 25.232,27.682 C10_pwr.2
VDD_LDO_OUT: C7_pwr.2 C8_pwr.2 J4_pwr.2 J5_pwr.1 R12_pwr.1 U3_pwr.5 | length 23.1
  Top Layer w0.381: R12_pwr.1 29.552,14.609 29.862,14.299 30.112,14.299 30.365,14.046 30.365,11.049 30.746,10.668 32.524,10.668 33.817,11.961 34.251,11.961 C8_pwr.2 ; U3_pwr.5 U3_pwr.5@33.855,19.011 ; J5_pwr.1 C8_pwr.2 ; J4_pwr.2 33.943,18.923 U3_pwr.5@33.855,19.011 ; U3_pwr.5@33.855,19.011 33.855,17.592 34.556,16.891 34.556,15.134 C7_pwr.2 34.535,12.393 C8_pwr.2
pads on no net: J3_pwr.1 J4_pwr.3

## Other copper
Multi-Layer:
  text "Pour signal planes with ground, attach to layer 2 and 3 with many, many vias. Route power. /  / Isolate ground routing for DC components. /  / Add input and output fuses, input inductors, pads, input diodes. /  / Stitching vias" at 51.689,7.366 h1.52